# Altium PCB CCU.PcbDoc (part 2 of 2)
Units mm, origin at the board's own origin, x right, y up, seen from the top; angles counter-clockwise.
Board outline 60 x 47.5 mm, 2 copper layers (Top Layer, Bottom Layer), stack 1.591 mm thick; 65 components, 51 nets, 236 pads, 128 vias.
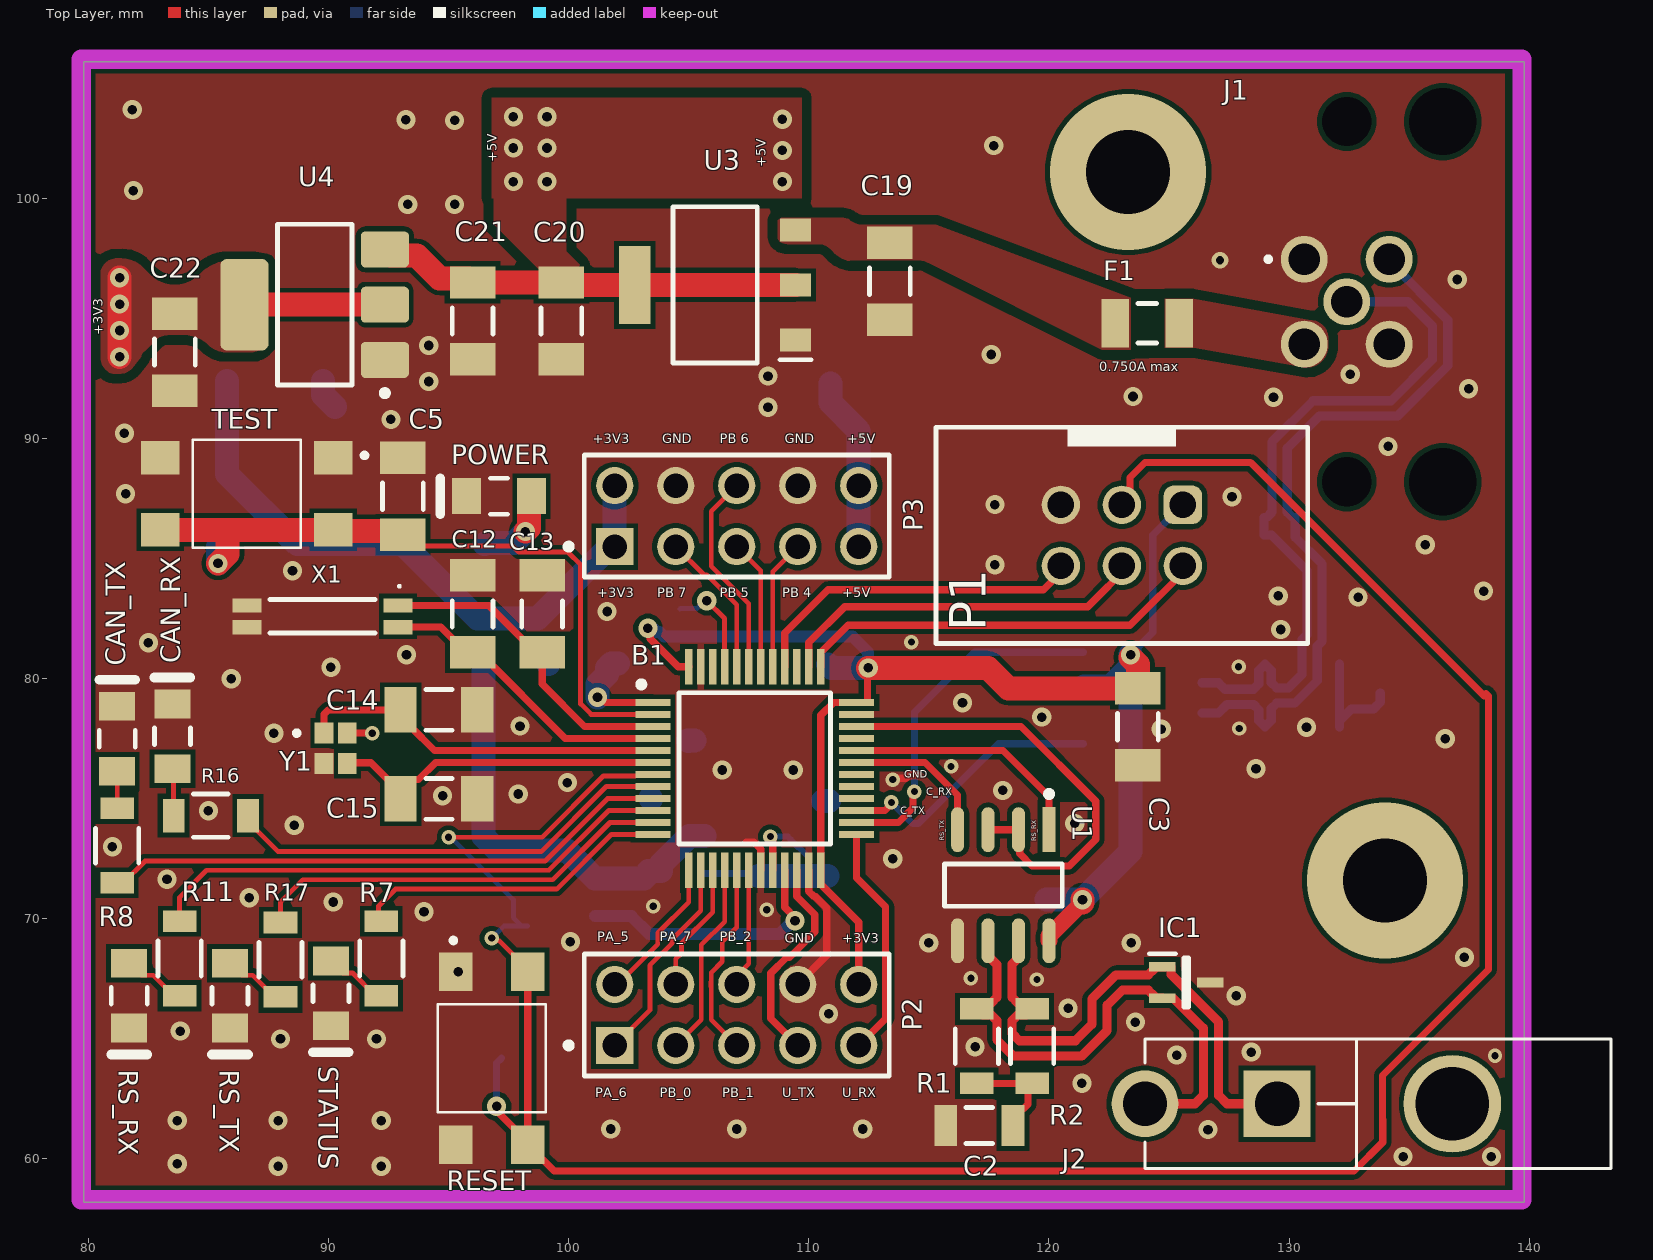
[diagram p0: Top Layer view]

## Part data (continued)
U2: "Texas Instruments - SN65HVD232DR - Can Transceiver, 1MBPS, 1/1, 3.3V, SOIC-8, Full Reel", Case/Package=SOIC, Manufacturer="Texas Instruments", Manufacturer Lifecycle Status=ACTIVE, Manufacturer Part Number=SN65HVD232DR, Max Operating Temperature=85°C, Max Supply Voltage=3.6V, Min Operating Temperature=-40°C, Min Supply Voltage=3V, Nominal Supply Current=17mA, Package="SOIC-8 Texas Instruments", Category="CAN Transceivers", Check_prices=https://www.snapeda.com/parts/SN65HVD232D/Texas+Instruments/view-part/?ref=eda, ComponentLink1Description=https://octopart.com:443/opatz8j6/c1?t=KNMFt9M64p-_id6rZ0-P1CX6CGmvk_NFg0bt7DHXbi_P10EFF0MZE_9gM8ERckOxIywTBgDrXd4Bw1XwEAcVVdK92p9CEfdSNaVajf6_bxnez3EeN1RE1wZBaojbXTwQ_101S7Bb856c3hUAWErS0_zGIM1B6Z6dFQwv_Ps2SUdVVUCjmJkLnMLZKTBWfnIVcgJIheW78JYanUyW_1u-I93chBuiSPXQYIk2xXb9JgOyrE9lHEnesRSQq9luJOd1yknyGQP0N3Is0_dGM9QrGV5UOgjoada9tMnQwKJP8gahr3iTK59XJFH6OfbHTOm3R9BdESCrBMbrE2MVOGPPkVOTrqf0YMovDpmf-konbncFnSES8CNOhHqMwHv2HEwKcPoK44nl&src-supplier=Texas+Instruments, ComponentLink1URL=https://octopart.com:443/opatz8j6/c1?t=KNMFt9M64p-_id6rZ0-P1CX6CGmvk_NFg0bt7DHXbi_P10EFF0MZE_9gM8ERckOxIywTBgDrXd4Bw1XwEAcVVdK92p9CEfdSNaVajf6_bxnez3EeN1RE1wZBaojbXTwQ_101S7Bb856c3hUAWErS0_zGIM1B6Z6dFQwv_Ps2SUdVVUCjmJkLnMLZKTBWfnIVcgJIheW78JYanUyW_1u-I93chBuiSPXQYIk2xXb9JgOyrE9lHEnesRSQq9luJOd1yknyGQP0N3Is0_dGM9QrGV5UOgjoada9tMnQwKJP8gahr3iTK59XJFH6OfbHTOm3R9BdESCrBMbrE2MVOGPPkVOTrqf0YMovDpmf-konbncFnSES8CNOhHqMwHv2HEwKcPoK44nl&src-supplier=Texas+Instruments, ComponentLink2Description=https://sigma.octopart.com:443/49249642/technical_drawing/Texas-Instruments-SN65HVD232DR.pdf?src-supplier=Texas+Instruments, ComponentLink2URL=https://sigma.octopart.com:443/49249642/technical_drawing/Texas-Instruments-SN65HVD232DR.pdf?src-supplier=Texas+Instruments, ComponentLink3Description=https://datasheet.octopart.com:443/SN65HVD232DR-Texas-Instruments-datasheet-81447765.pdf?src-supplier=Upverter, ComponentLink3URL=https://datasheet.octopart.com:443/SN65HVD232DR-Texas-Instruments-datasheet-81447765.pdf?src-supplier=Upverter, ComponentLink4Description=https://datasheet.octopart.com:443/SN65HVD232DR-Texas-Instruments-datasheet-37140773.pdf?src-supplier=Newark, ComponentLink4URL=https://datasheet.octopart.com:443/SN65HVD232DR-Texas-Instruments-datasheet-37140773.pdf?src-supplier=Newark, ComponentLink5Description=https://datasheet.octopart.com:443/SN65HVD232DR-Texas-Instruments-datasheet-14436966.pdf?src-supplier=Newark, ComponentLink5URL=https://datasheet.octopart.com:443/SN65HVD232DR-Texas-Instruments-datasheet-14436966.pdf?src-supplier=Newark, ComponentLink6Description=https://datasheet.octopart.com:443/SN65HVD232DR-Texas-Instruments-datasheet-58296547.pdf?src-supplier=Newark, ComponentLink6URL=https://datasheet.octopart.com:443/SN65HVD232DR-Texas-Instruments-datasheet-58296547.pdf?src-supplier=Newark, ComponentLink7Description=https://datasheet.octopart.com:443/SN65HVD232DR-Texas-Instruments-datasheet-48117850.pdf?src-supplier=Newark, ComponentLink7URL=https://datasheet.octopart.com:443/SN65HVD232DR-Texas-Instruments-datasheet-48117850.pdf?src-supplier=Newark, ComponentLink8Description=https://datasheet.octopart.com:443/SN65HVD232DR-Texas-Instruments-datasheet-10256024.pdf?src-supplier=Arrow+Electronics, ComponentLink8URL=https://datasheet.octopart.com:443/SN65HVD232DR-Texas-Instruments-datasheet-10256024.pdf?src-supplier=Arrow+Electronics, ComponentLink9Description=https://datasheet.octopart.com:443/SN65HVD232DR-Texas-Instruments-datasheet-149765.pdf?src-supplier=Mouser, ComponentLink9URL=https://datasheet.octopart.com:443/SN65HVD232DR-Texas-Instruments-datasheet-149765.pdf?src-supplier=Mouser, ComponentLink10Description=https://datasheet.octopart.com:443/SN65HVD232DR-Texas-Instruments-datasheet-62292544.pdf?src-supplier=Farnell, ComponentLink10URL=https://datasheet.octopart.com:443/SN65HVD232DR-Texas-Instruments-datasheet-62292544.pdf?src-supplier=Farnell, ComponentLink11Description=https://datasheet.octopart.com:443/SN65HVD232DR-Texas-Instruments-datasheet-164416263.pdf?src-supplier=SHENGYU+ELECTRONICS, ComponentLink11URL=https://datasheet.octopart.com:443/SN65HVD232DR-Texas-Instruments-datasheet-164416263.pdf?src-supplier=SHENGYU+ELECTRONICS, ComponentLink12Description=https://datasheet.octopart.com:443/SN65HVD232DR-Texas-Instruments-datasheet-159115712.pdf?src-supplier=LCSC, ComponentLink12URL=https://datasheet.octopart.com:443/SN65HVD232DR-Texas-Instruments-datasheet-159115712.pdf?src-supplier=LCSC, ComponentLink13Description=https://datasheet.octopart.com:443/SN65HVD232DR-Texas-Instruments-datasheet-137316104.pdf?src-supplier=Future+Electronics, ComponentLink13URL=https://datasheet.octopart.com:443/SN65HVD232DR-Texas-Instruments-datasheet-137316104.pdf?src-supplier=Future+Electronics, ComponentLink14Description=https://datasheet.octopart.com:443/SN65HVD232DR-Texas-Instruments-datasheet-8625468.pdf?src-supplier=Verical, ComponentLink14URL=https://datasheet.octopart.com:443/SN65HVD232DR-Texas-Instruments-datasheet-8625468.pdf?src-supplier=Verical, ComponentLink15Description=https://datasheet.octopart.com:443/SN65HVD232DR-Texas-Instruments-datasheet-8378736.pdf?src-supplier=Verical, ComponentLink15URL=https://datasheet.octopart.com:443/SN65HVD232DR-Texas-Instruments-datasheet-8378736.pdf?src-supplier=Verical, ComponentLink16Description=http://sigma.octopart.com:80/conflict_mineral_statement/Texas-Instruments-company-63.pdf?src-supplier=Compliance+Statements, ComponentLink16URL=http://sigma.octopart.com:80/conflict_mineral_statement/Texas-Instruments-company-63.pdf?src-supplier=Compliance+Statements, ComponentLink17Description=http://sigma.octopart.com:80/reach_statement/Texas-Instruments-company-64.pdf?src-supplier=Compliance+Statements, ComponentLink17URL=http://sigma.octopart.com:80/reach_statement/Texas-Instruments-company-64.pdf?src-supplier=Compliance+Statements, Data Rate=1Mbps, Height=1.75mm, Lead Free="Lead Free", Length=4.9mm, Lifecycle Status=Production, MF="Texas Instruments", MP=SN65HVD232D, Number of Drivers=1, Number of Receive Buffers=1, Number of Receivers=1, Number of Transceivers=1, Number of Transmit Buffers=1, Packaging="Cut Tape", Pins=8, Pricing="2500=1,1159, 5000=1,076, 7500=1,062 (USD)", Radiation Hardening=No, REACH SVHC=No, RoHS=Compliant, Schedule B="8542390000, 8542390000|8542390000|8542390000|8542390000|8542390000", SnapEDA_Link=https://www.snapeda.com/parts/SN65HVD232D/Texas+Instruments/view-part/?ref=snap, Stock=10000, Supplier="Arrow Electronics", Supplier Part Number=SN65HVD232DR, Thickness=1.58mm, Weight=72.603129mg, Width=3.91mm
U3: "1A LOW DROPOUT VOLTAGE REGULATOR", Manufacturer_Name="Advanced Monolithic Systems", Datasheet Link=http://www.advanced-monolithic.com/pdf/ds1117.pdf, Geometry.Height=1.8mm, Manufacturer_Part_Number=AMS1117-5.0
U4: "Fixed Positive LDO Regulator", Manufacturer=Diotec, Supplier Part Number=637-LDI1117-3.3H, Category="Voltage Regulators - Linear", ComponentLink1Description=https://datasheet.octopart.com/LDI1117-3.3H-Diotec-datasheet-154607892.pdf?src-supplier=TME, ComponentLink1URL=https://datasheet.octopart.com/LDI1117-3.3H-Diotec-datasheet-154607892.pdf?src-supplier=TME, ComponentLink2Description=https://datasheet.octopart.com/LDI1117-3.3H-Diotec-datasheet-159101088.pdf?src-supplier=SOS+electronic, ComponentLink2URL=https://datasheet.octopart.com/LDI1117-3.3H-Diotec-datasheet-159101088.pdf?src-supplier=SOS+electronic, ComponentLink3Description=https://datasheet.octopart.com/LDI1117-3.3H-Diotec-datasheet-189099648.pdf?src-supplier=Master+Electronics, ComponentLink3URL=https://datasheet.octopart.com/LDI1117-3.3H-Diotec-datasheet-189099648.pdf?src-supplier=Master+Electronics, Manufacturer Part Number=LDI1117-3.3H, Pricing="1=0,4, 10=0,286, 50=0,286, 100=0,199, 1000=0,163, 10000=0,089 (USD)", RoHS=No, Stock=5056, Supplier=Mouser
X1: "Parallel - Fundamental Quartz Crystal, 0.032768MHz Nom", Case/Package=SMD/SMT, ESR (Equivalent Series Resistance)=65kΩ, Frequency=32.768kHz, Frequency Tolerance=0.002%, Load Capacitance=12.5pF, Manufacturer=TXC, Manufacturer_Name="TXC CORPORATION", Max Operating Temperature=85°C, Min Operating Temperature=-40°C, Mouser Part Number=717-9HT7-32.768KDZFT, Supplier Part Number=2819319, Arrow Part Number=9HT7-32.768KDZF-T, Arrow Price/Stock=https://www.arrow.com/en/products/9ht7-32.768kdzf-t/txc-corporation?region=nac, Category=Crystals, ComponentLink1Description=https://datasheet.octopart.com:443/9HT7-32.768KDZF-T-TXC-datasheet-21225340.pdf?src-supplier=element14+APAC, ComponentLink1URL=https://datasheet.octopart.com:443/9HT7-32.768KDZF-T-TXC-datasheet-21225340.pdf?src-supplier=element14+APAC, ComponentLink2Description=https://datasheet.octopart.com:443/9HT7-32.768KDZF-T-TXC-datasheet-181441158.pdf?src-supplier=Newark, ComponentLink2URL=https://datasheet.octopart.com:443/9HT7-32.768KDZF-T-TXC-datasheet-181441158.pdf?src-supplier=Newark, ComponentLink3Description=https://datasheet.octopart.com:443/9HT7-32.768KDZF-T-TXC-datasheet-188932442.pdf?src-supplier=TME, ComponentLink3URL=https://datasheet.octopart.com:443/9HT7-32.768KDZF-T-TXC-datasheet-188932442.pdf?src-supplier=TME, Datasheet Link=https://componentsearchengine.com/Datasheets/2/9HT7-32.768KDZF-T.pdf, Geometry.Height=1.4mm, Height=508µm, Lead Free="Lead Free", Length=1.4mm, Lifecycle Status=Production, Manufacturer Part Number=9HT7-32.768KDZF-T, Manufacturer_Part_Number=9HT7-32.768KDZF-T, Mounting Technology="Surface Mount", Mouser Price/Stock=https://www.mouser.co.uk/ProductDetail/TXC-Corporation/9HT7-32.768KDZF-T?qs=MEJ8UTjcHDlobjP3Uu4Bsg%3D%3D, Packaging="Tape & Reel", REACH SVHC=No, RoHS=Compliant, Schedule B="8541600080, 8541600080|8541600080|8541600080|8541600080|8541600080|8541600080|8541600080|8541600080|8541600080|8541600080|8541600080|8541600080|8541600080|8541600080|8541600080|8541600080|8541600080|8541600080|8541600080|8541600080|8541600080|8541600080|8541600080|85", Stock=7957, Supplier=Farnell, Termination=SMD/SMT, Tolerance=0.002%, Width=1.397mm
Y1: "Crystal, Quartz, 24 MHz, SMD, 2mm x 1.6mm x 0.5mm, 20 ppm, 8 pF, 10 ppm, ABM11W", ESR (Equivalent Series Resistance)=100Ω, Frequency=24MHz, Frequency Stability=20ppm, Frequency Tolerance=0.001%, Load Capacitance=8pF, Manufacturer=Abracon, Max Operating Temperature=85°C, Min Operating Temperature=-40°C, Package="SMD-4 Abracon LLC", Supplier Part Number=535-13835-1-ND, Category=Crystals, Check_prices=https://www.snapeda.com/parts/ABM11W-24.0000MHZ-8-D1X-T3/Abracon/view-part/?ref=eda, China RoHS=Compliant, ComponentLink1Description=https://datasheet.octopart.com:443/ABM11W-24.0000MHZ-8-D1X-T3-Abracon-datasheet-154833168.pdf?src-supplier=IHS, ComponentLink1URL=https://datasheet.octopart.com:443/ABM11W-24.0000MHZ-8-D1X-T3-Abracon-datasheet-154833168.pdf?src-supplier=IHS, ComponentLink2Description=https://datasheet.octopart.com:443/ABM11W-24.0000MHZ-8-D1X-T3-Abracon-datasheet-102760955.pdf?src-supplier=Upverter, ComponentLink2URL=https://datasheet.octopart.com:443/ABM11W-24.0000MHZ-8-D1X-T3-Abracon-datasheet-102760955.pdf?src-supplier=Upverter, ComponentLink3Description=https://datasheet.octopart.com:443/ABM11W-24.0000MHZ-8-D1X-T3-Abracon-datasheet-112015802.pdf?src-supplier=Master+Electronics, ComponentLink3URL=https://datasheet.octopart.com:443/ABM11W-24.0000MHZ-8-D1X-T3-Abracon-datasheet-112015802.pdf?src-supplier=Master+Electronics, ComponentLink4Description=https://datasheet.octopart.com:443/ABM11W-24.0000MHZ-8-D1X-T3-Abracon-datasheet-182204996.pdf?src-supplier=Master+Electronics, ComponentLink4URL=https://datasheet.octopart.com:443/ABM11W-24.0000MHZ-8-D1X-T3-Abracon-datasheet-182204996.pdf?src-supplier=Master+Electronics, ComponentLink5Description=https://sigma.octopart.com:443/141159858/technical_drawing/Abracon-ABM11W-24.0000MHZ-8-D1X-T3.pdf?src-supplier=Abracon+SCT, ComponentLink5URL=https://sigma.octopart.com:443/141159858/technical_drawing/Abracon-ABM11W-24.0000MHZ-8-D1X-T3.pdf?src-supplier=Abracon+SCT, ComponentLink6Description=http://sigma.octopart.com:80/conflict_mineral_statement/Abracon-company-27.pdf?src-supplier=Compliance+Statements, ComponentLink6URL=http://sigma.octopart.com:80/conflict_mineral_statement/Abracon-company-27.pdf?src-supplier=Compliance+Statements, ESR=30Ω, Height=500µm, Length=2mm, Lifecycle Status=Production, Manufacturer Part Number=ABM11W-24.0000MHZ-8-D1X-T3, MF="Abracon LLC", Mounting Technology="Surface Mount", MP=ABM11W-24.0000MHZ-8-D1X-T3, Pricing="1=0,38, 10=0,334, 25=0,3156, 50=0,3024, 100=0,29, 250=0,27424, 500=0,26288, 1000=0,25201 (USD)", REACH SVHC=Yes, RoHS=Compliant, SnapEDA_Link=https://www.snapeda.com/parts/ABM11W-24.0000MHZ-8-D1X-T3/Abracon/view-part/?ref=snap, Stock=2752, Supplier=DigiKey, Tolerance=0.001%, Width=1.6mm

## Via types
v1: diameter 0.8, hole 0.4, Top Layer to Bottom Layer, 109 vias
v2: diameter 0.6, hole 0.3, Top Layer to Bottom Layer, 16 vias
v3: diameter 6.5, hole 3.5, Top Layer to Bottom Layer, 2 vias
v4: diameter 0.7, hole 0.35, Top Layer to Bottom Layer, 1 vias

## Nets (pads, with @x,y where several pads share a name; then routed paths per layer and width w, separated by ;. In a path a pad name is that pad's centre, name@x,y a point inside that pad or via, vN(x,y) a via of type N, cw(c..) or ccw(c..) an arc to the next point about the centre after c; other vN are vias at no path point)
+3V3: B1.1 B1.24 B1.36 B1.48 C1.1 C3.1 C6.2 C7.2 C8.2 C9.2 C10.2 C11.2 C18.2 C22.2 D1.1 J5.1 J5.2 L1.2 L2.2 P1.1 P2.10 P3.1 P3.2 R5.1 R6.1 R9.1 U1.8 U2.3 U4.2 U4.4 | length 125
  Top Layer w0.3: v1(101.2,79.225) 101.335,79.225 101.548,79.012 B1.1 ; v1(103.3,82.1) 103.396,82.004 103.396,81.667 104.563,80.5 B1.48 ; B1.24 110.5,71.436 112.08,69.856 P2.10 ; B1.24@110.5,72.05 110.5,78.475 111.037,79.012 B1.36 112.44,79.012 112.44,80.415 v1(112.475,80.45) ; v1@123.4,80.893 v1(123.4,81)
  Top Layer w0.7: U1.8 120.005,69.292 v1@121.4,70.687
  Top Layer w1: v1(81.3,93.4) v1(81.3,94.5) v1(81.3,95.6) v1(81.3,96.7) ; U4.4@86.436,95.511 U4.4 U4.2 ; v1(112.475,80.45) 117.462,80.45 118.312,79.6 C3.1 123.7,80.593 v1@123.4,80.893 ; v1@121.4,70.687 v1(121.4,70.8)
  Bottom Layer w0.3: v1(103.3,82.1) v1@103.396,82.004 ; C1.1 C1.1@119.9,70.8 ; v1(123.4,81) 124.325,81.925 124.325,85.985 P1.1
  Bottom Layer w0.5: v1@103.396,82.004 103.434,82.043 103.57,82.043 103.661,81.951 103.777,81.951 103.978,81.75 111.825,81.75 112.475,81.1 v1(112.475,80.45)
  Bottom Layer w0.7: U2.3 122.735,79.835
  Bottom Layer w1: J5.2 85.775,88.525 88.7,85.6 93.1,85.6 96.2,82.5 R9.1 98.7,82.5 101.425,85.225 101.645,85.225 P3.1 P3.2 ; C6.2 96.45,73.436 97.036,72.85 99.935,72.85 L2.2 103.135,71.685 C18.2@103.325,71.875 ; C7.2 C7.2@99.163,80.613 ; v1(101.2,79.225) 101.2,79.775 101.6,80.175 101.6,80.45 101.775,80.625 C8.2 ; C18.2@103.325,72 103.85,72 103.85,72.275 105.035,73.46 L1.2 ; C11.2 110.95,80.45 v1(112.475,80.45) ; C1.1@119.9,70.8 v1(121.4,70.8) 123.4,72.8 123.4,80.5 ; 122.735,79.835 123.4,80.5 ; v1(123.4,81) 123.4,80.5
+5V_OUT: C20.2 C21.2 J3.1 J3.2 J4.1 J4.2 P3.9 P3.10 U3.2 U3.4 U4.3 | length 25
  Top Layer w1: U4.3 92.6,97.625 93.675,97.625 94.625,96.675 95.825,96.675 C21.2 C20.2 99.7,96.4 U3.4 ; U3.4@102.8,96.4 U3.2
  Bottom Layer w1: J3.2@110.9,92.3 110.9,91.5 112.08,90.32 P3.10 P3.9
  other v1: 97.7,100.7 99.1,100.7 108.9,100.7 108.9,102 97.7,102.1 99.1,102.1 108.9,103.3 97.7,103.4 99.1,103.4
+12V: C19.2 F1.2 U3.3
+12V_EXT: F1.1 J1.2
"CAN RX": B1.26 U2.4 | length 14.7
  Top Layer w0.3: B1.26 113.731,74.012 114.343,74.624 114.343,75.243 v2(114.4,75.3)
  Bottom Layer w0.3: v2(114.4,75.3) 114.4,78.6 116.905,81.105 U2.4
"CAN TX": B1.27 U2.1 | length 11.4
  Top Layer w0.3: B1.27 113.176,74.512 113.44,74.776 v2(113.44,74.85)
  Bottom Layer w0.3: v2(113.44,74.85) 114.321,73.969 114.569,73.969 117.895,77.295 U2.1
CAN_LED_RX: B1.8 R16.1 | length 18.8
  Top Layer w0.2: R16.1 86.65,74.05 87.9,72.8 98.857,72.8 101.569,75.512 B1.8
CAN_LED_TX: B1.9 R8.1 | length 23.8
  Top Layer w0.2: R8.1 81.45,71.5 82.36,72.41 99.018,72.41 101.62,75.012 B1.9
CAN_N: IC2.1 J1.5 R10.2 U2.6 | length 30.3
  Bottom Layer w0.381: U2.6 127.055,79.835 127.33,79.56 128.517,79.56 128.74,79.783 128.74,80.34 R10.2 129.26,80.34 129.26,79.841 129.483,79.617 129.976,79.617 130.54,80.182 130.54,81.626 130.74,81.826 130.74,84.512 129.262,85.99 128.959,85.99 128.95,86 128.95,86.7 128.959,86.71 129.059,86.71 129.29,86.94 129.29,89.863 131.002,91.575 134.25,91.575 135.975,93.3 135.975,94.675 134.954,95.696 132.404,95.696 J1.5
CAN_P: IC2.2 J1.4 R3.2 U2.7 | length 30.7
  Bottom Layer w0.381: U2.7 127.055,78.565 127.415,78.925 128.517,78.925 128.74,78.701 128.74,78.26 R3.2 129.26,78.26 129.26,78.759 129.483,78.982 130.239,78.982 131.175,79.919 131.175,81.363 131.375,81.563 131.375,84.775 130.26,85.891 130.26,86.341 IC2.2 130.25,86.7 130.241,86.71 130.148,86.71 129.925,86.933 129.925,89.6 131.265,90.94 134.513,90.94 136.61,93.037 136.61,94.938 134.168,97.38 J1.4
GND: B1.19 B1.23 B1.35 B1.47 C1.2 C2.2 C3.2 C4.1 C5.1 C6.1 C7.1 C8.1 C9.1 C10.1 C11.1 C12.1 C13.1 C14.1 C15.1 C16.1 C17.1 C18.1 C19.1 C20.1 C21.1 C22.1 C23.2 CAN_RX.2 CAN_TX.2 D1.2 IC1.3 IC2.3 J1.1 J1.3 J3.3 J3.4 J4.3 J4.4 J5.3 J5.4 P1.5 P2.8 P3.4 P3.8 POWER.2 R4.1 RESET.1 RESET.2 RS_RX.2 RS_TX.2 STATUS.2 TEST.1 TEST.2 U1.5 U2.2 U3.1 U4.1 X1.2 X1.3 Y1.2 Y1.4 | length 11.7
  Top Layer w0.3: Y1.4@90.9,77.7 90.934,77.734 91.822,77.734 v2(91.825,77.731) ; 107.4,73.2 107.706,73.2 108,72.906 B1.19 ; P2.8 110.75,68.48 110.75,70.457 110.271,70.936 110.205,70.936 110,71.142 B1.23 ; v2(113.5,75.8) 113.557,75.857 114.038,75.857 114.181,76 114.4,76
  Top Layer w1: C22.1@83.511,91.911 C22.1 ; U4.1@91.85,93.025 92.1,93.275 U4.1 U4.1@92.363,93.287
  Bottom Layer w1: J5.4 89.775,91.825 J5.4@90.275,91.325 ; C18.1 C18.1@103.425,75 ; C9.1@104.988,77.412 C9.1 C9.1@105.25,77.425 ; C16.1@110.6,74.9 C16.1@110.85,74.9
  other v1: 87.9,59.7 92.2,59.7 83.7,59.8 134.75,60.1 138.425,60.1 126.625,61.225 101.75,61.25 107,61.25 112.25,61.25 83.7,61.6 87.9,61.6 92.2,61.6 121.375,63.15 125.325,64.325 128.425,64.45 116.925,64.675 88,65 92,65 83.825,65.325 123.6,65.7 110.825,66.05 120.8,66.275 127.8,66.8 95.4,67.8 137.3,68.4 115,69 123.425,69 100.075,69.05 93.975,70.3 90.2,70.7 86.7,70.875 83.275,71.65 113.5,72.5 81,73 88.575,73.9 121.075,73.975 85,74.5 94.75,75.125 97.9,75.2 118.075,75.35 99.95,75.675 106.4,76.2 109.35,76.2 128.625,76.25 136.5,77.5 87.725,77.725 124.675,77.9 130.725,77.975 97.975,78.025 119.7,78.4 116.4,79 85.95,80 90.1,80.475 93.25,81 82.5,81.5 129.65,82.05 101.6,82.8 132.875,83.4 129.55,83.45 138.1,83.65 88.5,84.5 117.75,84.75 135.675,85.575 117.75,87.25 127.625,87.575 81.55,87.7 134.125,89.675 81.5,90.225 92.6,90.8 108.3,91.3 129.35,91.725 123.5,91.75 137.475,92.075 94.175,92.375 108.3,92.6 132.55,92.675 117.6,93.5 94.175,93.875 137,96.625 93.3,99.75 95.25,99.75 81.875,100.325 117.7,102.2 95.25,103.25 93.225,103.275 81.825,103.7
  other v2: 138.575,64.3 119.5,67.475 116.75,67.525 108.25,70.375 103.525,70.525 115.925,76.35 127.925,77.925 127.9,80.5 114.275,81.525
  other v4: 127.125,97.425
HSE_IN: B1.5 C14.2 Y1.1 | length 14.7
  Top Layer w0.3: Y1.1 89.813,78.524 89.989,78.7 C14.2 ; C14.2@93.3,78 93.425,78 94.413,77.012 B1.5
HSE_OUT: B1.6 C15.2 Y1.3 | length 14.3
  Top Layer w0.3: Y1.3@90.8,76.5 91.775,76.5 C15.2@93,75.275 ; C15.2@93.025,75.3 93,75.3 C15.2 C15.2@93,75.275 ; B1.6 94.462,76.512 93.75,75.8 93.525,75.8 C15.2@93,75.275
JTAG_RESET: B1.7 C4.2 P1.3 R5.2 RESET.3 RESET.4 | length 107
  Top Layer w0.2: v2(95,73.4) 98.9,73.4 101.452,75.952 102.757,75.952 102.767,75.962 103.462,75.962 B1.7 ; v2(96.8,69.2) 96.915,69.085 97.115,69.085 98.3,67.9 RESET.3
  Top Layer w0.3: v1(97,62.2) 97.096,62.104 97.096,61.904 RESET.4@98.3,60.7 ; RESET.3 RESET.4@98.3,60.7 ; P1.3@123.375,87.3 123.375,88.375 124,89 128.4,89 138.112,79.287 ; 138.2,79.375 138.3,79.275 138.3,67.887 133.895,63.482 133.895,61.638 133.9,61.633 133.9,60.7 132.7,59.5 99.4,59.5 RESET.4 RESET.4@98.3,60.7
  Bottom Layer w0.2: v2(95,73.4) 95.1,73.4 97.7,70.8 97.7,70.05 R5.2@98.05,69.7 ; v2(96.8,69.2) 97.3,69.7 R5.2@98.05,69.7 ; R5.2 R5.2@98.05,69.7
  Bottom Layer w0.3: v1(97,62.2) 97,64 C4.2
JTAG_SWCLK: B1.38 P1.4 | length 15.7
  Top Layer w0.3: B1.38 110,81.507 111.493,83 121.615,83 P1.4@123.375,84.76
JTAG_SWDIO: B1.37 P1.2 | length 17.5
  Top Layer w0.3: B1.37 110.5,81.088 111.637,82.224 123.379,82.224 P1.2@125.915,84.76
JTAG_SWO: B1.40 P1.6 | length 14.4
  Top Layer w0.3: B1.40 109,81.9 110.804,83.704 119.779,83.704 P1.6@120.835,84.76
LSE_IN: B1.3 C13.2 X1.1 | length 13.5
  Top Layer w0.3: X1.1 96.675,83.05 98.625,81.1 C13.2 98.9,79.775 100.663,78.012 B1.3
LSE_OUT: B1.4 C12.2 X1.4 | length 12.5
  Top Layer w0.3: X1.4 94.675,82.15 95.725,81.1 C12.2 96.275,81.1 99.863,77.512 B1.4
NetB1_45: B1.45 R4.2 | length 4.3
  Top Layer w0.2: v1(105.75,83.25) 106.49,82.51 106.49,80.51 B1.45
  Bottom Layer w0.2: R4.2@104.625,82.9 104.65,82.925 105.35,82.925 105.675,83.25 v1(105.75,83.25)
NetC2_1: C2.1 R1.1 R2.1 | length 4.2
  Top Layer w0.3: R1.1 119.125,63.15 119.125,62.276 118.949,62.1 118.825,62.1 118.5,61.775 C2.1
NetC23_1: C23.1 R3.1 R10.1 | length 5.2
  Bottom Layer w0.381: R10.1 R3.1 132.1,78.25 132.591,78.741 133.515,78.741 133.8,79.025 C23.1
NetCAN_RX_1: CAN_RX.1 R16.2 | length 2
  Top Layer w0.2: CAN_RX.1 83.55,76.2 R16.2
NetCAN_TX_1: CAN_TX.1 R8.2 | length 1.6
  Top Layer w0.2: R8.2 CAN_TX.1
NetPOWER_1: POWER.1 R9.2 | length 3.5
  Top Layer w1: v1(98.2,86.125) 98.35,86.275 98.35,87.5 POWER.1
  Bottom Layer w1: R9.2 96.55,85.65 97.725,85.65 v1(98.2,86.125)
NetR7_2: R7.2 STATUS.1 | length 2.7
  Top Layer w0.2: STATUS.1 90.6,67.75 91,67.75 91.95,66.8 R7.2
NetR11_2: R11.2 RS_RX.1 | length 2.7
  Top Layer w0.2: RS_RX.1 82.2,67.65 82.7,67.65 83.55,66.8 R11.2
NetR17_2: R17.2 RS_TX.1 | length 2.7
  Top Layer w0.2: RS_TX.1 86.4,67.65 86.85,67.65 87.75,66.75 R17.2
PA_5: B1.13 P2.2 | length 6.1
  Top Layer w0.2: P2.2 102.041,67.27 103.711,68.94 103.711,69.411 105,70.7 B1.13
PA_6: B1.14 P2.1 | length 8.8
  Top Layer w0.2: P2.1 103.385,66.195 103.385,68.063 104.31,68.988 104.31,69.157 105.5,70.347 B1.14
PA_7: B1.15 P2.4 | length 5.4
  Top Layer w0.2: P2.4 104.46,68.339 104.7,68.579 104.7,68.981 106,70.281 B1.15
PB_0: B1.16 P2.3 | length 8.1
  Top Layer w0.2: P2.3 105.525,65.795 105.525,68.914 106.5,69.889 B1.16
PB_1: B1.17 P2.5 | length 8.2
  Top Layer w0.2: P2.5 105.935,65.795 105.935,67.111 105.929,67.174 cw(c107,67.27) 105.929,67.366 105.935,67.429 105.935,67.677 105.935,67.76 106.4,68.225 106.4,68.308 106.4,69.043 106.459,69.102 107,69.643 B1.17
PB_2: B1.18 P2.6 | length 5
  Top Layer w0.2: P2.6 107,67.635 107.5,68.135 B1.18
PB_4: B1.41 P3.7 | length 5.4
  Top Layer w0.2: B1.41 108.5,84.46 P3.7
PB_5: B1.42 P3.5 | length 5.4
  Top Layer w0.2: P3.5 108,84.5 B1.42
PB_6: B1.43 P3.6 | length 8.6
  Top Layer w0.2: P3.6 105.935,86.975 105.935,84.692 107.5,83.127 B1.43
PB_7: B1.44 P3.3 | length 6.1
  Top Layer w0.2: P3.3 105.638,84.322 105.753,84.322 107,83.076 B1.44
"RS485 RX": B1.32 U1.1 | length 10.2
  Top Layer w0.3: B1.32 118.088,77.012 120.005,75.095 U1.1
"RS485 TX": B1.31 U1.4 | length 6.2
  Top Layer w0.3: B1.31 114.838,76.512 116.195,75.155 U1.4
RS485_N: IC1.1 J2.1 R2.2 U1.7 | length 22.5
  Top Layer w0.381: U1.7 118.735,68.387 118.467,68.119 118.467,66.733 118.691,66.51 119.04,66.51 R2.2 119.04,65.99 118.691,65.99 118.467,65.767 118.467,65.228 118.771,64.925 121.102,64.925 121.79,65.613 121.79,66.663 122.794,67.668 124.142,67.668 124.365,67.891 124.365,67.991 124.375,68 IC1.1 125.075,68 125.085,67.991 125.085,67.688 127.068,65.705 127.068,62.65 127.417,62.3 J2.1
RS485_P: IC1.2 J2.2 R1.2 U1.6 | length 22.1
  Top Layer w0.381: U1.6 117.465,68.466 117.832,68.099 117.832,66.733 117.609,66.51 117.26,66.51 R1.2 117.26,65.99 117.609,65.99 117.832,65.767 117.832,64.965 118.508,64.29 121.365,64.29 122.425,65.35 122.425,66.4 123.058,67.033 124.142,67.033 124.365,66.809 124.365,66.71 124.375,66.7 IC1.2 124.735,66.691 125.184,66.691 126.433,65.442 126.433,62.65 126.083,62.3 J2.2
RS485_RE_DE: B1.34 U1.2 U1.3 | length 19
  Top Layer w0.3: B1.34 118.838,78.012 121.95,74.9 121.95,73.3 120.85,72.2 119.3,72.2 118.781,72.719 118.781,73.667 U1.2 U1.3
"RS_LED_TX": B1.11 R17.1 | length 17.7
  Top Layer w0.2: R17.1 88,70.7 88.93,71.63 99.341,71.63 101.723,74.012 B1.11
RS_LED_RX: B1.10 R11.1 | length 22.2
  Top Layer w0.2: R11.1 83.8,70.9 84.92,72.02 99.18,72.02 101.672,74.512 B1.10
STATUS_LED: B1.12 R7.1 | length 13.3
  Top Layer w0.2: R7.1 92.083,70.017 92.083,70.533 92.79,71.24 99.503,71.24 101.775,73.512 B1.12
TEST: B1.2 C5.2 R6.2 TEST.3 TEST.4 | length 30
  Top Layer w0.2: C5.2@92.9,86.1 93.475,85.525 97.683,85.525 97.933,85.275 99.974,85.275 100.5,84.749 100.5,78.949 100.937,78.512 B1.2
  Top Layer w1: TEST.4 85.8,86.2 ; v1(85.4,84.8) 85.8,85.2 85.8,86.2 ; C5.2@92.9,86.1 92.85,86.15 90.25,86.15 TEST.3 85.8,86.2
  Bottom Layer w1: v1(85.4,84.8) 85.4,85.5 85.6,85.7 85.6,85.85 85.65,85.9 R6.2
UART_RX: B1.25 P2.9 | length 9.7
  Top Layer w0.3: B1.25 111.988,71.712 113.195,70.505 113.195,65.845 P2.9
UART_TX: B1.22 P2.7 | length 8.9
  Top Layer w0.3: B1.22 109.5,70.934 110.25,70.184 110.25,69.45 109.195,68.395 109.074,68.395 108.415,67.736 108.415,65.855 P2.7
VDDA: B1.21 L2.1 | length 11.1
  Top Layer w0.3: B1.21 109,70.485 109.425,70.06 v1(109.425,69.925)
  Bottom Layer w0.5: L2.1 102.608,70.115 103.348,69.375 108.794,69.375 109.344,69.925 v1(109.425,69.925)
VREF: B1.20 C16.2 C17.2 L1.1 | length 9.8
  Top Layer w0.3: v2(108.4,73.425) 108.4,73.344 108.5,73.245 B1.20
  Bottom Layer w0.257: v2@108.401,73.425 109.125,73.425 109.254,73.296 109.972,72.578 109.972,72.321 110.518,71.775 C16.2
  Bottom Layer w0.3: L1.1 107.785,71.89 C17.2
  Bottom Layer w1: C17.2@107.9,71.775 C16.2
pads on no net: B1.28 B1.29 B1.30 B1.33 B1.39 B1.46 J1.6 J1.7 J1.8 J1.9 J2.P$3 U2.5 U2.8
copper on no net:
  other v3: 134,71.6 123.3,101.1

## Polygon pours and split planes (outlines as drawn)
GND on Bottom Layer "GND_L02_P036" (solid, pour order 36): 79.7,105.8 139.7,105.8 139.7,58.3 79.7,58.3
+5V_OUT on Bottom Layer "+5V_OUT_L02_P034" (solid, pour order 34): 96.8,104.7 96.8,99.9 100.6,99.9 100.6,90.5 102.7,90.5 102.7,104.7 102.7,90.5 102.7,104.7
+5V_OUT on Bottom Layer "+5V_OUT_L02_P031" (solid, pour order 31): 109.9,90.5 111.9,90.5 112,104.6 107.9,104.6 107.9,100 109.8,100 109.8,99.8
+3V3 on Bottom Layer "+3V3_L02_P021" (solid, pour order 21): 85.7,97.6 ccw(c85.459,97.359) 85.459,97.7 81.598,97.7 ccw(c81.598,96.497) 80.748,97.348 ccw(c81.345,96.75) 80.5,96.75 80.5,93.329 ccw(c81.026,93.329) 80.654,92.957 80.857,92.754 ccw(c81.229,93.126) 81.229,92.6 85,92.6 ccw(c85,93.083) 85.341,92.741 85.7,93.1
+3V3 on Bottom Layer "+3V3_L02_P003" (solid, pour order 3): 84.7,91.1 ccw(c85.2,91.1) 85.2,90.6 86.5,90.6 ccw(c86.5,91) 86.9,91 86.9,104.2 ccw(c86.4,104.2) 86.4,104.7 85.6,104.7 ccw(c85.6,103.8) 84.7,103.8
+3V3 on Bottom Layer "+3V3_L02_P007" (solid, pour order 7): 111.7,81 ccw(c111.4,81) 111.4,81.3 96,81.3 ccw(c96,81.05) 95.8,81.2 95.8,80 ccw(c96,80.15) 96,79.9 111.4,79.9 ccw(c111.4,80.2) 111.7,80.2
+3V3 on Bottom Layer "+3V3_L02_P010" (solid, pour order 10): 95.8,82.2 95.8,79.5 96.617,79.5 ccw(c96.617,80.183) 97.1,79.7 ccw(c96.859,79.941) 97.2,79.941 97.2,82.5 96.362,82.5 ccw(c96.362,81.988) 96,82.35
GND on Top Layer "GND_L01_P038" (solid, pour order 38): 78.975,105.688 138.975,105.688 138.975,58.188 78.975,58.188
+12V_EXT on Top Layer "+12V_EXT_L01_P012" (solid, pour order 12): 124.825,93.75 124.825,95.825 126.025,95.825 130.9,94.925 cw(c130.9,94.2) 131.625,94.2 131.625,93.85 cw(c130.725,93.85) 130.725,92.95 126.025,93.775 124.825,93.775
+12V on Top Layer "+12V_L01_P019" (solid, pour order 19): 123.4,95.858 115.317,98.9 112.4,98.9 cw(c112.291,99.845) 111.7,99.1 ccw(c111.459,98.86) 111.459,99.2 108.8,99.2 ccw(c108.87,99.03) 108.7,99.1 108.7,98.4 ccw(c108.991,98.421) 108.8,98.2 ccw(c109.091,98.562) 109.141,98.1 110.4,98.1 cw(c110.4,97.377) 110.912,97.888 111,97.8 ccw(c111.833,98.445) 111.7,97.4 114.5,97.4 cw(c114.63,96.748) 115.014,97.29 122.2,93.7 123.4,93.7
+5V_OUT on Top Layer "+5V_OUT_L01_P037" (solid, pour order 37): 96.8,104.2 96.8,100 109.7,100 109.7,104.2
+5V_OUT on Top Layer "+5V_OUT_L01_P035" (solid, pour order 35): 100.65,97.05 99.9,97.8 99.9,104.175 99.875,104.2 96.875,104.2 96.875,98.925 98.75,97.05
+3V3 on Top Layer "+3V3_L01_P032" (solid, pour order 32): 86.8,97.4 85.907,97.4 ccw(c85.907,95.693) 84.7,96.9 84.624,96.824 cw(c83.6,97.849) 83.6,96.4 cw(c83.6,97.849) 82.576,96.824 82.254,97.146 ccw(c81.4,96.293) 81.4,97.5 81.183,97.5 ccw(c81.183,96.817) 80.7,97.3 ccw(c81.183,96.817) 80.5,96.817 80.5,93.4 ccw(c81.224,93.4) 80.712,92.888 80.8,92.8 ccw(c81.041,93.041) 81.041,92.7 81.3,92.7 ccw(c81.3,93.424) 81.812,92.912 82.2,93.4 cw(c82.562,93.35) 82.341,93.641 82.8,94.1 cw(c83.283,93.617) 83.283,94.3 84.034,94.3 cw(c84.034,92.934) 85,93.9 ccw(c85.724,94.624) 85.724,93.6 86.8,93.6 ccw(c86.8,94.324) 87.312,93.812 87.5,94 cw(c87.741,94.241) 87.4,94.241 87.4,97.3

## Keep-outs
Keep-Out Layer:
  lines w0.8: 79.7,58.3 139.7,58.3 139.7,105.8 79.7,105.8 79.7,58.3

## Other copper
Top Layer:
  pour cut-out: 106.225,83.25 106.8,83.25 106.8,82.525 106.2,82.525
  pour cut-out: 124.225,67.812 124.225,66.887 125.275,66.887 125.275,67.812
  pour cut-out: 118.7,77.7 121.6,74.85 120.375,74.85 120.1,75.375 118.225,77.25
  pour cut-out: 118.325,68.575 118.075,68.4 117.85,68.55 117.8,70.125 118.45,70.1
  pour cut-out: 118.45,62.9 117.825,62.85 117.875,62.375 118.5,62.35
  pour cut-out: 124.725,96.213 123.501,96.238 123.448,93.324 124.751,93.374
  pour cut-out: 111.225,78.775 111,78.55 111,78.35 111.5,78.35 111.475,78.375 111.475,78.775
  pour cut-out: 110.725,73.45 111.075,73.45 111.075,78.675 111,78.75 110.975,78.725 110.725,78.725
  pour cut-out: 94.1,76.9 92.682,78.318 90.4,78.5 90.4,77.1 92.7,76.1 93.4,76.1 94.1,76.8
  pour cut-out: 106.8,84.625 106.5,84.45 107.65,83.275 107.8,84.45 107.475,84.75
  pour cut-out: 105.65,85.375 105.325,85.4 105.3,84.975 105.725,84.975
  pour cut-out: 105.225,68.75 104.95,68.825 104.775,68.325 105.125,68 105.375,68.375
  pour cut-out: 105.9,68.85 105.65,68.5 106.025,68.2 106.225,68.675
  pour cut-out: 107.025,69.35 106.575,68.9 106.575,68.25 107.2,68.15 107.375,69.15
  pour cut-out: 111.125,73.3 110.75,72.875 110.775,71.55 111.55,70.725 111.975,70.7 112.3,70.475 112.3,70.05 112.375,68.2 112.65,68 112.925,68.075 112.95,70.4 111.775,71.575 111.75,73.2
  pour cut-out: 112.8,77.75 112.8,77.3 118.225,77.225 118.75,77.7
  pour cut-out: 110.975,83.425 109.225,81.8 109.225,81.35 109.7,81.325 109.775,81.65 111.2,83.025
  pour cut-out: 118.1,66.65 117.8,66.35 118.1,65.875 118.525,66.225
  pour cut-out: 100.175,80.4 99.175,80.325 99.15,79.85 100.3,78.825 100.275,80.35
  pour cut-out: 94.425,82.625 94.887,82.312 95.275,81.875 97.05,81.875 97.05,80.75 97.6,80.175 99.9,77.85 100.125,78.175 98.7,79.625 98.65,80.275 97.825,80.325 97.85,81.525 96.55,82.825 94.4,82.8
Bottom Layer:
  pour cut-out: 122.125,80.75 122.125,80.3 120.4,80.3 120.4,80.775 120.425,80.775
  pour cut-out: 132.375,80.45 133.275,80.45 133.275,78.975 132.375,78.975
  pour cut-out: 133.15,96.625 133.15,96 134.9,96 134.9,96.6
  pour cut-out: 129.95,86.787 129.95,85.963 129.2,85.963 129.2,86.787
  pour cut-out: 129.15,79.85 128.025,79.9 127.3,79.45 125.225,79.5 125.2,78.875 127.45,78.9 128.375,78.65 128.85,78.85
  pour cut-out: 110.375,69.575 110.525,69.275 110.1,68.95 109.375,69 109.5,69.475
  pour cut-out: 109.75,70.95 109.625,71.2 109,71.125 109.075,70.7 109.55,70.475 109.55,70.125 109.425,69.85 109.425,69.625 109.65,69.525 110.75,69.475 111.35,70.125 111.375,70.425 111.65,70.975
  pour cut-out: 114.675,74.9 114.125,74.9 114.075,74.55 114.4,74.25 114.75,74.575

## Silkscreen, mask and mechanical layers (free items; w line width, h text height)
Top Overlay:
  text "+5V" at 97,101.5 h0.4 r90
  text "+5V" at 108.2,101.3 h0.4 r90
  text "+3V3" at 80.6,94.3 h0.4 r90
  text "0.750A max" at 122.1,92.8 h0.4
  text "+3V3" at 101,89.8 h0.4
  text "GND" at 103.9,89.8 h0.4
  text "PB 6" at 106.3,89.8 h0.4
  text "GND" at 109,89.8 h0.4
  text "+5V" at 111.6,89.8 h0.4
  text "+3V3" at 101.2,83.4 h0.4
  text "PB 7" at 103.7,83.4 h0.4
  text "PB 5" at 106.3,83.4 h0.4
  text "PB 4" at 108.9,83.4 h0.4
  text "+5V" at 111.4,83.4 h0.4
  text "GND" at 113.98,75.874 h0.3
  text "C_RX" at 114.9,75.15 h0.3
  text "C_TX" at 113.8,74.35 h0.3
  text "RS_TX" at 115.642,73.25 h0.2 r90
  text "RS_RX" at 119.467,73.225 h0.2 r90
  text "PA_5" at 101.2,69.067 h0.4
  text "PA_7" at 103.8,69.067 h0.4
  text "PB_2" at 106.3,69.067 h0.4
  text "GND" at 109,69 h0.4
  text "+3V3" at 111.4,69 h0.4
  text "PA_6" at 101.1,62.567 h0.4
  text "PB_0" at 103.8,62.567 h0.4
  text "PB_1" at 106.4,62.567 h0.4
  text "U_TX" at 108.9,62.567 h0.4
  text "U_RX" at 111.4,62.567 h0.4
Bottom Overlay:
  drawing of 15 lines, arcs and shapes, not listed
  text "+3V3" at 85.2,105 h0.4
  text "GND" at 90.3,105 h0.4
  text "GND" at 106.2,105 h0.4
  text "GND" at 115.4,105 h0.4
  text "+5V" at 101.1,104.9 h0.4
  text "+5V" at 110.3,104.9 h0.4
  text "CAN H" at 135.15,98.65 h0.4
  text "SHIELD" at 131.675,98.6 h0.4
  text "CAN L" at 133.045,96.905 h0.3
  text "GND" at 134.725,92.375 h0.4
  text "+12V" at 131.275,92.3 h0.4
  text "GND" at 121,88.3 h0.4
  text "RESET" at 124,88.3 h0.4
  text "+3V3" at 126.4,88.3 h0.4
  text "SWO" at 121.05,85.775 h0.4
  text "SWCLK" at 124.075,85.775 h0.4
  text "SWDIO" at 126.5,85.775 h0.4
  text "+3V3" at 93.1,85.45 h0.3
  text "Can Converter Unit" at 84.675,84.05 h1 r90
  text "inz. Wiktor Grabowski" at 86.246,83.746 h1 r90
  text "C_TX" at 119.1,80.85 h0.3
  text "C_RX" at 119.025,77.15 h0.3
  text "+3V3" at 96.35,74.25 h0.3 r270
  text "RS485 A" at 125.3,60.2 h0.4
  text "RS485 B" at 130.8,60.2 h0.4
Dimensions:
  lines w0.254: 79.7,58.3 139.7,58.3 139.7,105.8 79.7,105.8 79.7,58.3